# EAGLE board SX1262-NRFDK Shield (EAGLE 9.7.0)
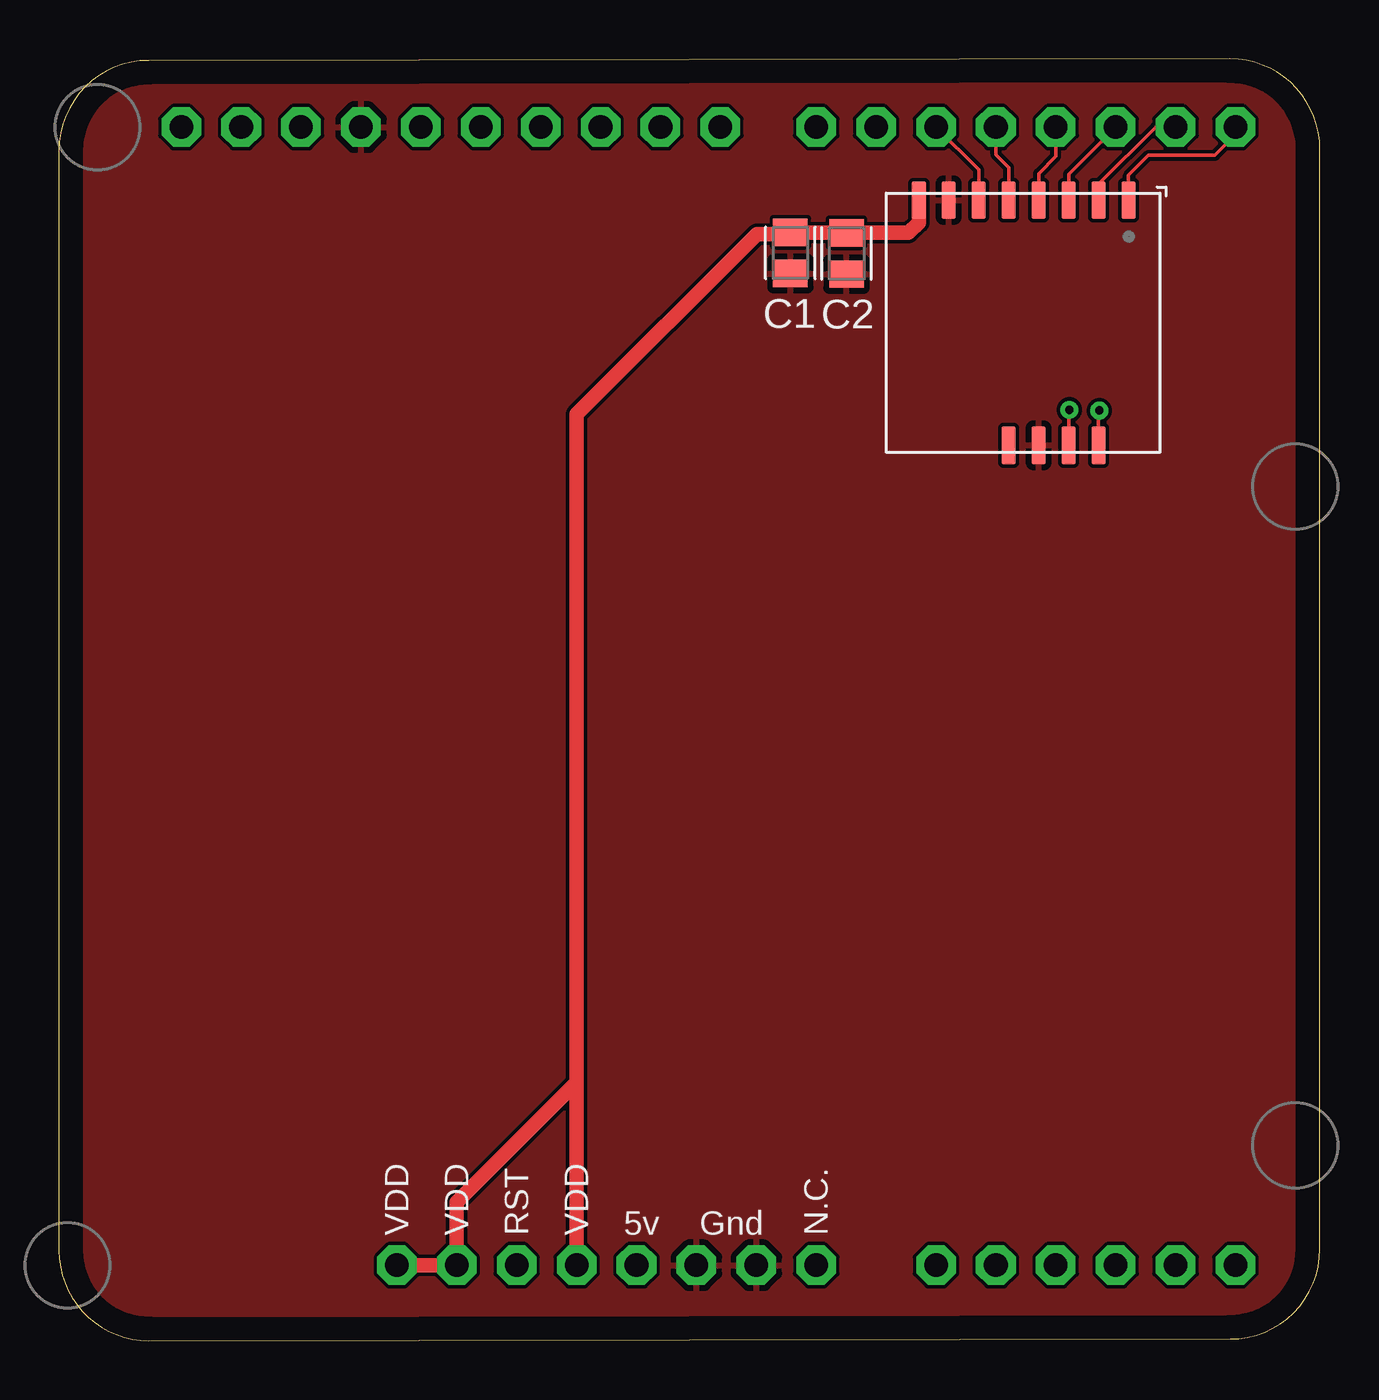
[diagram p0: board, top side]
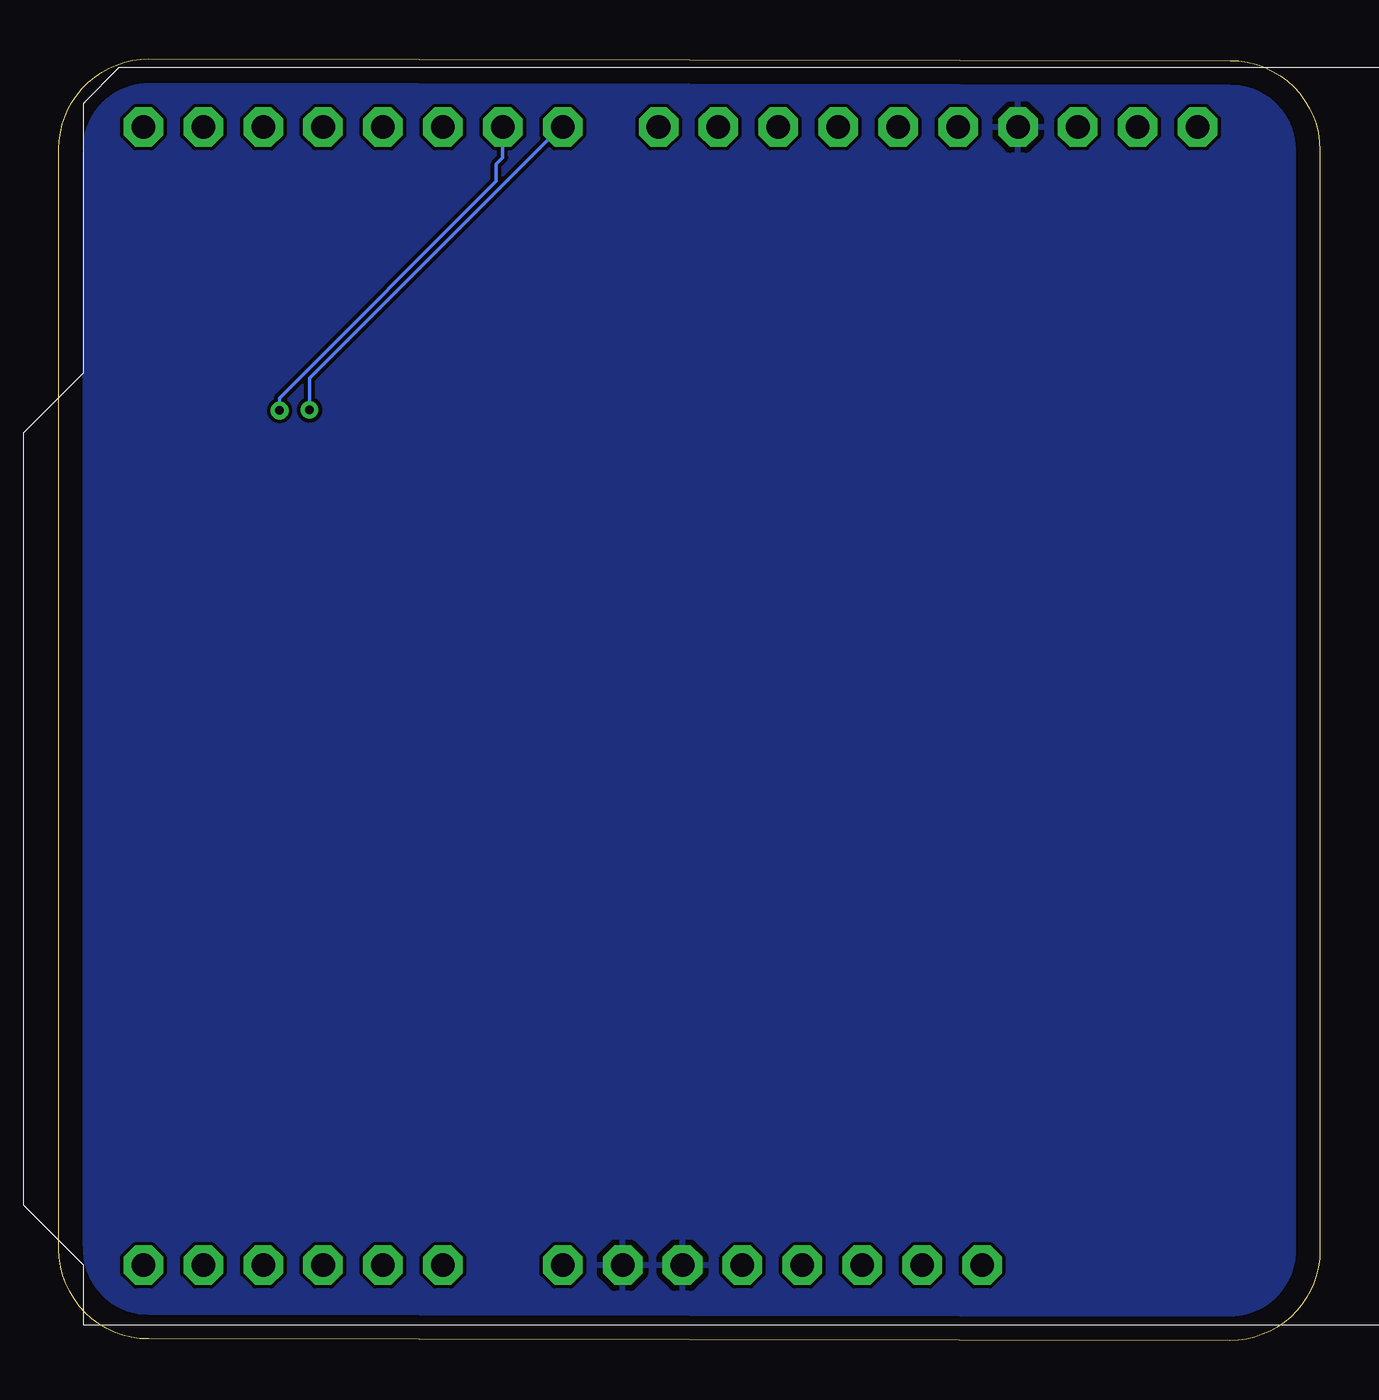
[diagram p1: board, bottom side, seen from below]

Size 53.47 x 54.35 mm. Coordinates in mm from the lower left corner, seen from the top.
Outline: 0,50.47 0,3.81 arc90 3.82,0 49.67,0.07 arc90 53.47,3.88 53.47,50.54 arc90 49.66,54.35 3.8,54.28 arc90 0,50.47
Copper layers (1*16): Top 0.035mm / dielectric 1.5mm / Bottom 0.035mm
Design rules "Fusion Electronics Design Rules": minimum track width 6mil, minimum drill 0.35mm, track to track 6mil, track to pad 6mil, pad to pad 6mil, via to via 6mil, smd to smd 6mil, copper to edge 40mil, drill to drill 6mil, minimum pad ring 10mil, minimum via ring 8mil, stop-mask expansion 4mil, vias tented up to drill 9999mil, thermal gap 10mil

## Footprints (pad centres in the part's own frame; a part is rotated, then mirrored left to right if it is on the bottom)
CAPC2012X110 = smd 1.165 x 1.465: 1 -0.875,0; 2 0.875,0
ARDUINOR3-BPLACE = drill 1 pad 1.676 octagon: 3V 35.56,2.54; 5V 38.1,2.54; A0 50.8,2.54; A1 53.34,2.54; A2 55.88,2.54; A3 58.42,2.54; A4 60.96,2.54; A5 63.5,2.54; AREF 23.876,50.8; D0 63.5,50.8; D1 60.96,50.8; D2 58.42,50.8; D3 55.88,50.8; D4 53.34,50.8; D5 50.8,50.8; D6 48.26,50.8; D7 45.72,50.8; D8 41.656,50.8; D9 39.116,50.8; D10 36.576,50.8; D11 34.036,50.8; D12 31.496,50.8; D13 28.956,50.8; GND 26.416,50.8; GND1 43.18,2.54; GND2 40.64,2.54; IOREF 30.48,2.54; RESERVED 27.94,2.54; RESET 33.02,2.54; SCL 18.796,50.8; SDA 21.336,50.8; VIN 45.72,2.54
MODULE12P-1.27-11X11.6MM = smd 0.6 x 1.6: 1 1.33,0.3; 2 2.6,0.3; 3 3.87,0.3; 4 5.14,0.3; 5 6.41,0.3; 6 7.68,0.3; 7 8.95,0.3; 8 10.22,0.3; 9 6.41,10.7; 10 5.14,10.7; 11 3.87,10.7; 12 2.6,10.7

## Placement (x,y rotation side)
C1  [CAPC2012X110]  31.01,46.12 270 top
C2  [CAPC2012X110]  33.4,46.1 270 top
U1  ARDUINOR3-BPLACE  [ARDUINOR3-BPLACE]  -13.61,0.65 0 top
U2  MODULE-WIO-SX1262MODULE12P-1.27-11X11.6MM  [MODULE12P-1.27-11X11.6MM]  46.69,48.66 180 top

## Library data of the parts
C1 C2 = Capacitor; CATEGORY: Capacitor
U1 = NRFDK SHIELD
U2 = Wio-SX1262 Schematic Package

## Nets
BUSY: U1.D7 U2.11
DIO1: U1.D6 U2.12
GND: C1.2 C2.2 U1.GND U1.GND1 U1.GND2 U2.7 U2.10
MISO: U1.D1 U2.2
MOSI: U1.D2 U2.3
N$14: U1.RESET
N$16: U1.5V
N$31: U1.D8
NSS: U1.D5 U2.6
RF_SW: U1.D0 U2.1
RST: U1.D4 U2.5
SCK: U1.D3 U2.4
VCC: C1.1 C2.1 U1.3V U1.IOREF U1.RESERVED U2.8
VIN: U1.VIN

## Tracks (layer width: path | path; a pad name or v marks a point on that pad's centre or on a via)
BUSY  (via drill 0.35)
  Top 0.152: U2.11 42.82,39.43 v42.85,39.47
  Bottom 0.152: v42.85,39.47 42.85,40.81 32.21,51.45 U1.D7
DIO1  (via drill 0.35)
  Top 0.152: U2.12 44.09,39.41 v44.12,39.44
  Bottom 0.152: v44.12,39.44 44.12,39.97 34.93,49.16 34.93,49.88 34.65,50.16 U1.D6
GND
  pour Bottom: 2.57,-7.55 55.14,-7.55 58.62,-4.06 58.62,54.06 51.81,60.88 -1.14,60.88 -5.23,56.78 -5.21,5.34 -5.21,5.34 -5.21,5.33 -5.21,5.31 -5.21,5.31 -5.21,0.23
  pour Top: 2.65,-4.83 52.65,-4.83 56.49,-0.99 56.49,52.52 51.81,57.2 0.87,57.2 -3.25,52.77 -3.25,1.07
MISO
  Top 0.152: U2.2 44.09,49.03 46.51,51.45 U1.D1
MOSI
  Top 0.152: U2.3 42.82,49.46 U1.D2
NSS
  Top 0.152: U2.6 39.01,49.64 U1.D5
RF_SW
  Top 0.152: U2.1 45.36,49.41 46.2,50.26 49.02,50.26 49.89,51.13 U1.D0
RST
  Top 0.152: U2.5 40.28,49.74 39.73,50.28 U1.D4
SCK
  Top 0.152: U2.4 41.55,49.49 42.27,50.22 U1.D3
VCC
  Top 0.61: U2.8 36.47,47.41 36.03,46.97 C2.1 31.04,46.97 C1.1 30.94,46.92 29.6,46.92 21.95,39.28 21.95,10.94 | 21.95,10.94 U1.3V | 21.95,10.94 16.87,5.86 U1.IOREF U1.RESERVED